# Altium PCB PCB1.PcbDoc
Units mm, origin at the board's own origin, x right, y up, seen from the top; angles counter-clockwise.
Board outline 53.47 x 77.85 mm, 2 copper layers (Top Layer, Bottom Layer); 24 components, 40 nets, 145 pads, 10 vias.
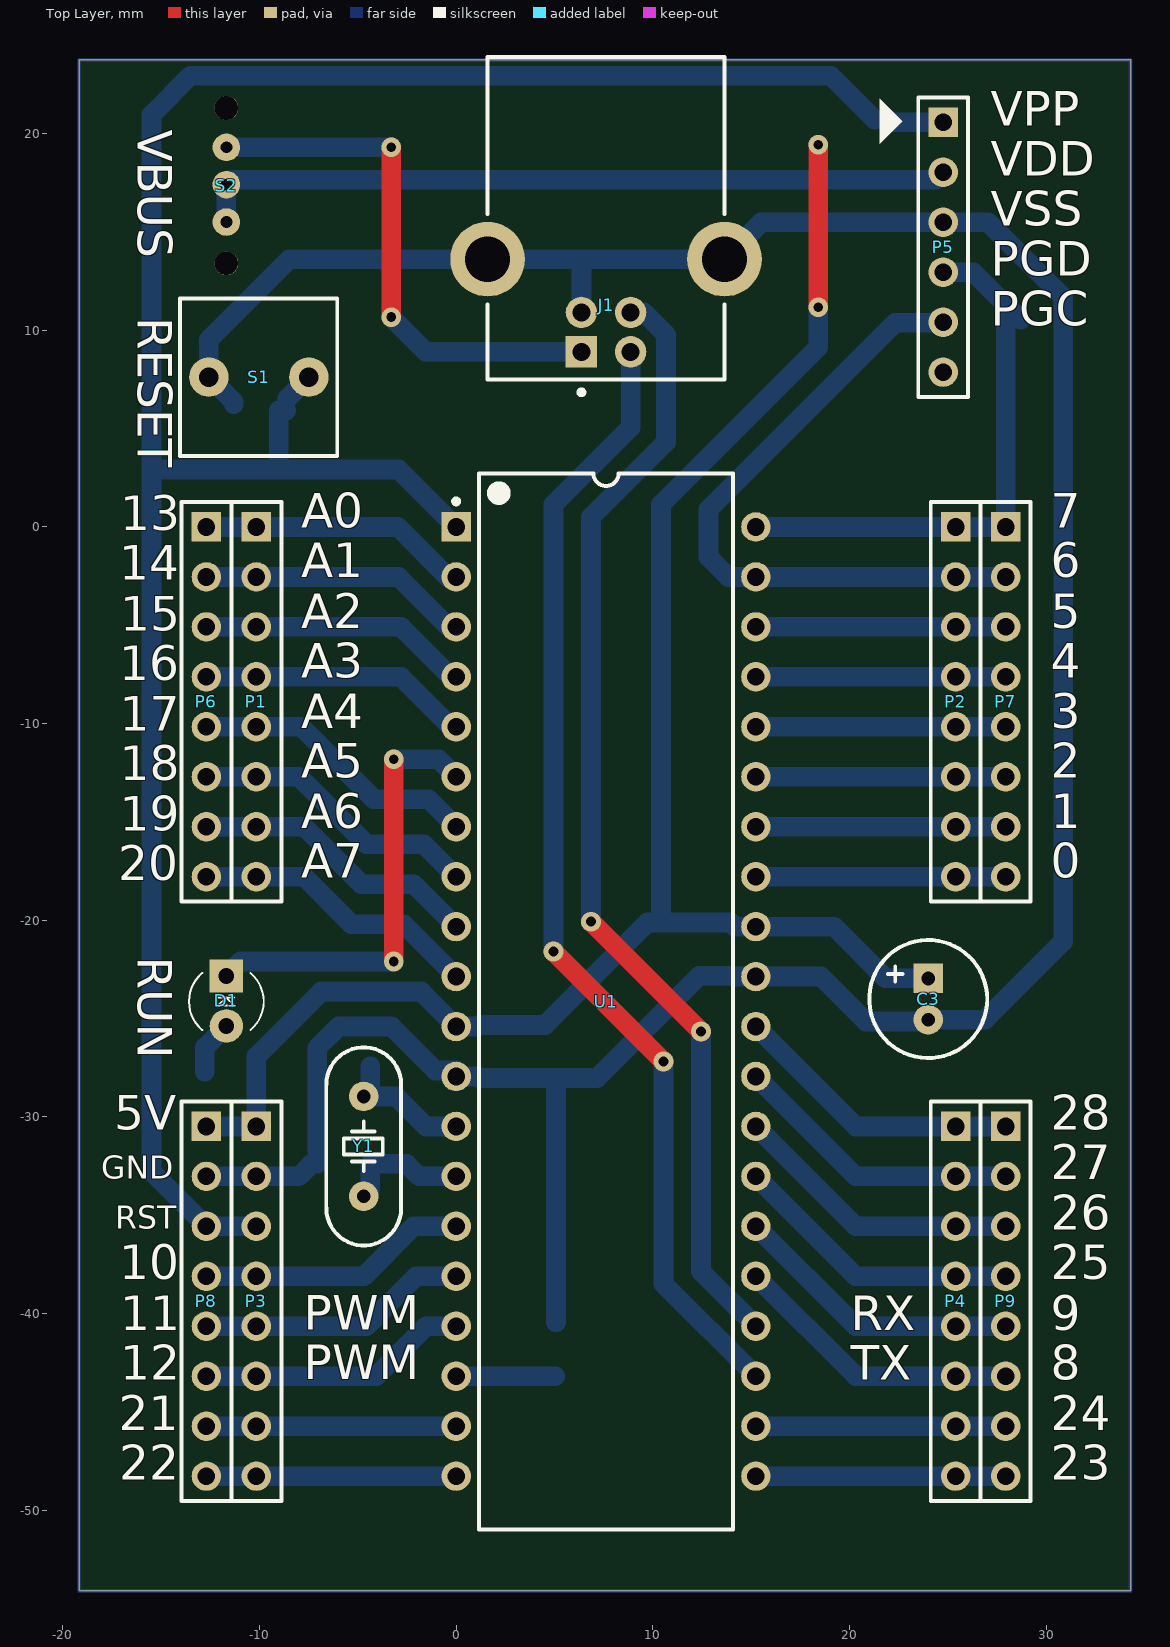
[diagram p0: Top Layer view]
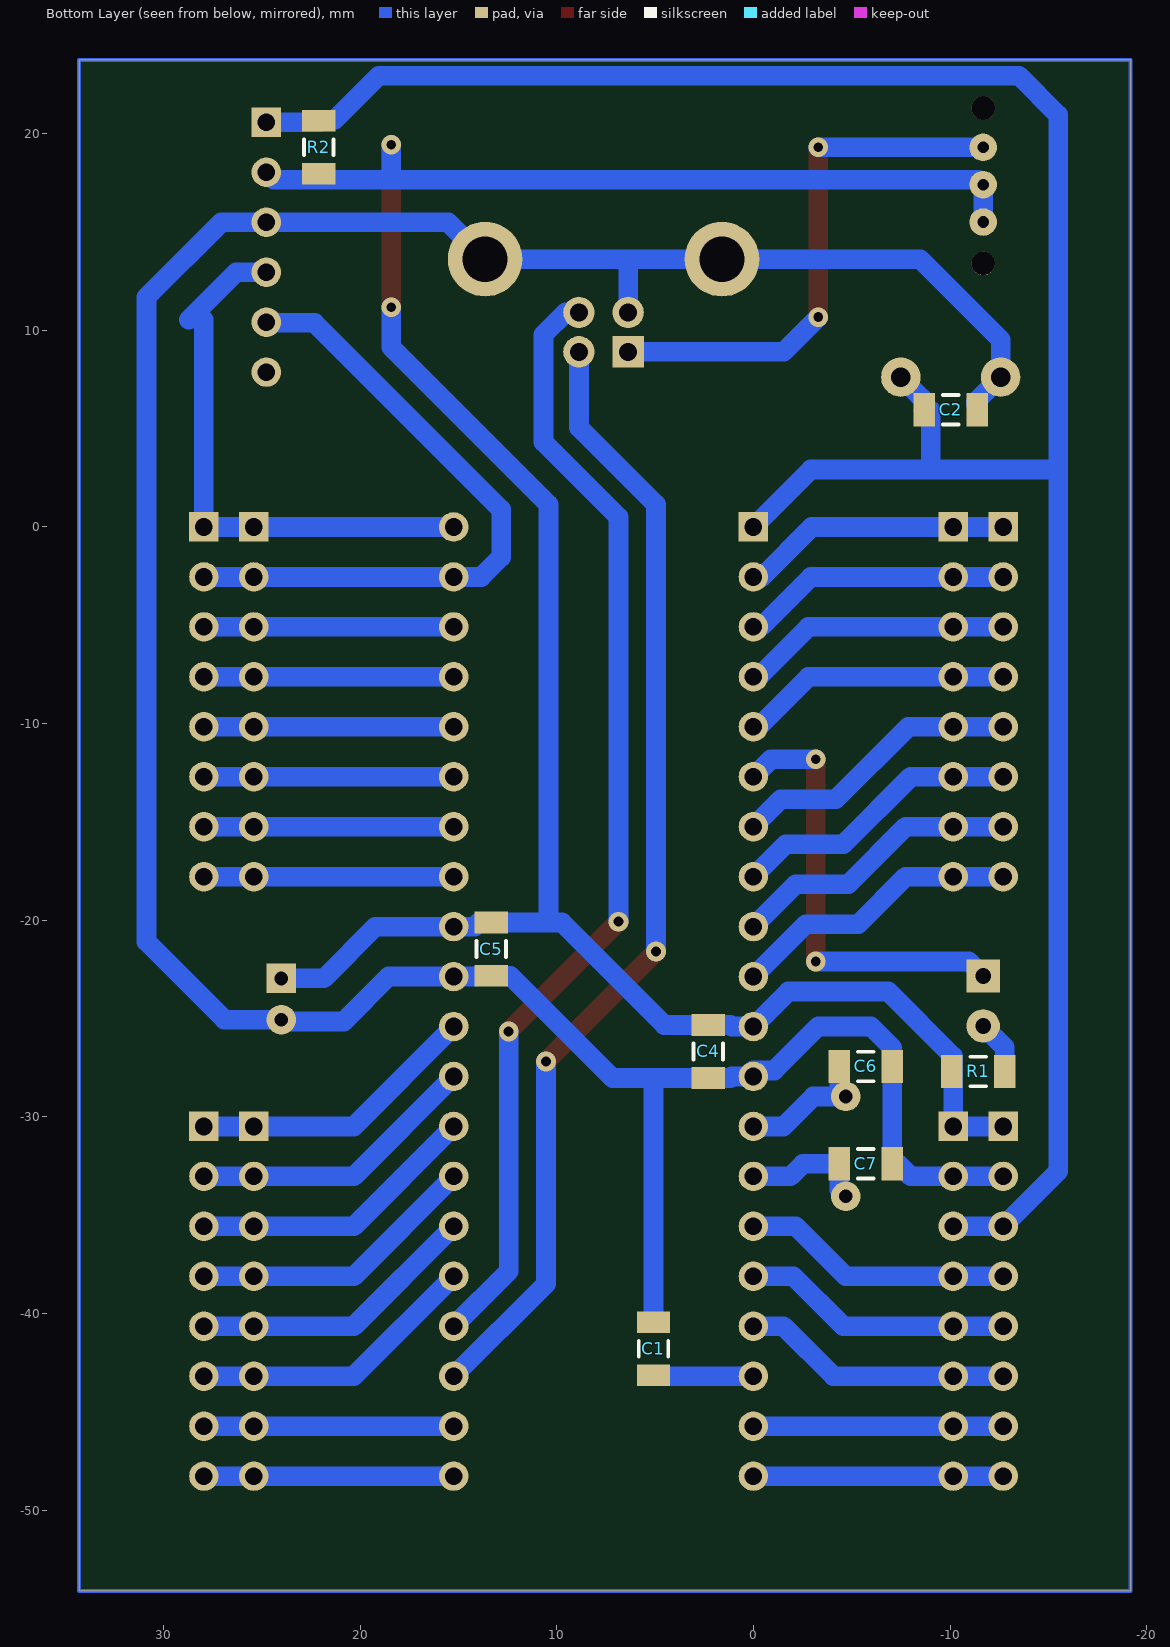
[diagram p1: Bottom Layer view, seen from below]

## Layer stack, top to bottom
Top Solder: solder mask 0.0102, Solder Resist, Dk 3.5
Top Layer: signal copper 0.0356
Dielectric 1: dielectric 0.32, FR-4, Dk 4.8
Bottom Layer: signal copper 0.0356
Bottom Solder: solder mask 0.0102, Solder Resist, Dk 3.5

## Board outline
-19.177,-54.102 -19.177,23.749 34.29,23.749 34.29,-54.102

## Design rules (kind name [scope] priority, off if disabled: settings)
Clearance [All] p1: gap=0.2
PolygonConnect [All] p1: connectstyle=Relief reliefconductorwidth=0.254 reliefentries=4 polygonreliefangle="90 Angle" airgapwidth=0.254
RoutingVias [All] p1: holewidth=0.711 width=1.27 viastyle="Through Hole" minholewidth=0.711 minwidth=1.27 maxholewidth=0.711 maxwidth=1.27
SolderMaskExpansion [All] p1: expansion=0.102
Width [All] p1: maxlimit=2 minlimit=0.5 preferedwidth=1
30 further rules are at their usual default settings.

## Components (designator, comment, footprint, x,y, rotation, side; value= is the part's Value field where it differs from the comment)
C1 "Cap" C1206 5.08,-41.783 r270 bottom
C2 "Cap" C1206 -10.033,5.969 r0 bottom
C3 "Cap Pol1" CAP1 24.003,-24.003 r90 top
C4 "Cap" C1206 2.286,-26.67 r90 bottom
C5 "Cap" C1206 13.335,-21.463 r90 bottom
C6 "Cap" C1206 -5.715,-27.432 r0 bottom
C7 "Cap" C1206 -5.715,-32.385 r0 bottom
D1 "LED" LED0 -11.684,-24.13 r90 top
J1 "USB-B_440119-1" USB-B 7.62,9.906 r90 top
P1 "Header 8" HDR1X8 -10.16,0 r270 top
P2 "Header 8" HDR1X8 25.4,0 r270 top
P3 "Header 8" HDR1X8 -10.16,-30.48 r270 top
P4 "Header 8" HDR1X8 25.4,-30.48 r270 top
P5 "Header 6" HDR1X6 24.765,20.574 r270 top
P6 "Header 8" HDR1X8 -12.7,0 r270 top
P7 "Header 8" HDR1X8 27.94,0 r270 top
P8 "Header 8" HDR1X8 -12.7,-30.48 r270 top
P9 "Header 8" HDR1X8 27.94,-30.48 r270 top
R1 "Res1" C1206 -11.43,-27.686 r0 bottom
R2 "Res1" C1206 22.098,19.304 r270 bottom
S1 "SW-PB" PUSH0 -12.573,7.62 r0 top
S2 "Switch 3 Pin Small" SW_ON_OFF_SMALL -11.684,19.304 r270 top
U1 "PIC18F4550-I/P" PDIP600-P40 7.62,-24.13 r0 top
Y1 "XTAL" XTAL -4.699,-31.496 r270 top

## Footprints (in the part's own frame and the unit in brackets; to place one, negate y for a bottom-side part, rotate by r counter-clockwise, add the part's x,y. Pads: shape width x height; smd on the part's side, far side on the other; paste and mask are expansions set on the pad)
C1206 [mm] "Chip Capacitor, Body 3.2x1.6mm, IPC High Density"
  rect 1.1x1.7 smd: 1(-1.35,0) 2(1.35,0)
  silkscreen extent -0.4,-0.75 0.4,0.75, body extent -1.7,-0.9 1.7,0.9, height 1.3
CAP1 [mm] "2.1mm Electrolyte Capacitor; 2 Leads"
  rect 1.5x1.5 hole 0.7: 1(1.05,0)
  round 1.5 hole 0.7: 2(-1.05,0)
  silkscreen extent -3,-3 3,3
HDR1X6 [mm] "Connector; Header; 6 Position"
  rect 1.5x1.5 hole 0.9: 1(0,0)
  round 1.5 hole 0.9: 2(2.54,0) 3(5.08,0) 4(7.62,0) 5(10.16,0) 6(12.7,0)
  silkscreen extent -1.27,-1.27 13.97,1.27
HDR1X8 [mm] "Connector; Header; 8 Position"
  rect 1.5x1.5 hole 0.9: 1(0,0)
  round 1.5 hole 0.9: 2(2.54,0) 3(5.08,0) 4(7.62,0) 5(10.16,0) 6(12.7,0) 7(15.24,0) 8(17.78,0)
  silkscreen extent -1.27,-1.27 19.05,1.27
LED0 [mm] "3mm Typical RED GaAs LED; 2 Leads"
  round 1.7 hole 0.8: 1(-1.24,0)
  rect 1.7x1.7 hole 0.8: 2(1.3,0)
  silkscreen extent -1.46,-1.9 1.46,1.9, body extent -1.89,-1.9 1.89,1.89, height 6.1
PDIP600-P40 [mm] "DIP, 40-Leads, Row Spacing 15.24mm, Pitch 2.54mm, Body 51.8x13.5mm"
  rect 1.5x1.5 hole 0.9: 1(-7.62,24.13)
  round 1.5 hole 0.9: 2(-7.62,21.59) 3(-7.62,19.05) 4(-7.62,16.51) 5(-7.62,13.97) 6(-7.62,11.43) 7(-7.62,8.89) 8(-7.62,6.35) 9(-7.62,3.81) 10(-7.62,1.27) 11(-7.62,-1.27) 12(-7.62,-3.81) 13(-7.62,-6.35) 14(-7.62,-8.89) 15(-7.62,-11.43) 16(-7.62,-13.97) 17(-7.62,-16.51) 18(-7.62,-19.05) 19(-7.62,-21.59) 20(-7.62,-24.13) 21(7.62,-24.13) 22(7.62,-21.59) 23(7.62,-19.05) 24(7.62,-16.51) 25(7.62,-13.97) 26(7.62,-11.43) 27(7.62,-8.89) 28(7.62,-6.35) 29(7.62,-3.81) 30(7.62,-1.27) 31(7.62,1.27) 32(7.62,3.81) 33(7.62,6.35) 34(7.62,8.89) 35(7.62,11.43) 36(7.62,13.97) 37(7.62,16.51) 38(7.62,19.05) 39(7.62,21.59) 40(7.62,24.13)
  silkscreen extent -7.74,-26.85 6.45,26.85, body extent -7.3,-26.85 7.3,26.85, height 6.35
PUSH0 [mm] "Push Button"
  round 2 hole 1: 1(0,0) 2(5.08,0)
  silkscreen extent -1.47,-4.01 6.53,3.99
SW_ON_OFF_SMALL [mm]
  round 1.2 hole 1.2: 0(-2,0) 0(5.9,0)
  round 1.4 hole 0.6: 1(0,0) 2(1.9,0) 3(3.8,0)
USB-B [mm] "Connector; USB1.1, Type B, Thru-Hole; 4 Position; Right Angle"
  rect 1.6x1.6 hole 0.92: 1(-1,1.25)
  round 1.6 hole 0.92: 2(-1,-1.25) 3(1,-1.25) 4(1,1.25)
  round 3.8 hole 2.3: 5(3.71,6.02) 6(3.71,-6.02)
  silkscreen extent -3.18,-6.02 13.99,6.02, body extent -3.04,-7.49 13.96,7.37, height 11.5
XTAL [mm] "Crystal, Thru Hole, 2 Leads"
  round 1.5 hole 0.7: 1(-2.54,0) 2(2.54,0)
  silkscreen extent -5.04,-1.91 5.04,1.91, body extent -5.67,-2.5 5.68,2.5, height 3.68

## Part data
C1 C2 C4 C5 C6 C7: "Capacitor"
C3: "Polarized Capacitor (Radial)"
D1: "Typical RED GaAs LED"
J1: "USB 1.1, Right Angle, Thru-Hole, B Type, Receptacle, 4 Position, Beige"
P1 P2 P3 P4 P6 P7 P8 P9: "Header, 8-Pin"
P5: "Header, 6-Pin"
R1 R2: "Resistor"
S1: "Switch"
S2: "Switch 3 Pin"
U1: "High Performance, Enhanced Flash, USB Microcontroller with nanoWatt Technology, 32K Flash, 40-Pin PDIP, Industrial Temperature Range"
Y1: "Crystal Oscillator"

## Via types
v1: diameter 1, hole 0.5, Top Layer to Bottom Layer, 10 vias

## Nets (pads, with @x,y where several pads share a name; then routed paths per layer and width w, separated by ;. In a path a pad name is that pad's centre, name@x,y a point inside that pad or via, vN(x,y) a via of type N, cw(c..) or ccw(c..) an arc to the next point about the centre after c; other vN are vias at no path point)
D+: J1.3 U1.24 | length 57.7
  Top Layer w1: v1(6.858,-20.066) v1(12.446,-25.654)
  Bottom Layer w1: v1(6.858,-20.066) 6.858,0.508 10.668,4.318 10.668,9.779 9.541,10.906 J1.3 ; v1(12.446,-25.654) 12.446,-37.846 U1.24
D-: J1.2 U1.23 | length 58
  Top Layer w1: v1(4.953,-21.59) v1(10.541,-27.178)
  Bottom Layer w1: v1(4.953,-21.59) 4.953,1.143 8.87,5.06 J1.2 ; v1(10.541,-27.178) 10.541,-38.481 U1.23
GND: C1.1 C2.1 C3.2 C4.1 C5.1 C6.1 C7.1 J1.4 J1.5 J1.6 P3.2 P5.3 P8.2 S1.1 U1.12 U1.31 | length 154.6
  Bottom Layer w1: P8.2 P3.2 -8.001,-33.02 -7.366,-32.385 C7.1 C6.1 -7.065,-26.496 -5.969,-25.4 -3.291,-25.4 -1.056,-27.635 0,-27.635 U1.12 1.092,-27.94 1.172,-28.02 C4.1 5.08,-28.02 ; C2.1@-11.303,6.256 -11.303,6.35 S1.1 -12.573,9.525 -8.482,13.616 J1.5 J1.6 15.518,15.494 24.003,15.494 ; C1.1 5.08,-28.02 ; J1.4 6.37,13.596 ; C3.2@24.003,-25.146 20.828,-25.146 18.542,-22.86 U1.31 14.119,-22.86 14.072,-22.813 12.366,-22.813 7.159,-28.02 5.08,-28.02 ; C3.2 26.89,-25.053 30.861,-21.082 30.861,11.684 27.051,15.494 P5.3
NetC1_2: C1.2 U1.18 | length 5
  Bottom Layer w1: U1.18 C1.2@5.033,-43.18
NetD1_1: D1.1 R1.1 | length 2.8
  Bottom Layer w1: R1.1 -12.78,-26.466 D1.1
NetD1_2: D1.2 U1.6 | length 22.4
  Top Layer w1: v1@-3.175,-21.844 v1(-3.175,-11.811)
  Bottom Layer w1: D1.2 -10.952,-22.098 v1(-3.175,-22.098) ; v1(-3.175,-11.811) -0.889,-11.811 U1.6
OSC1: C6.2 U1.13 Y1.1 | length 6.5
  Bottom Layer w1: C6.2 -4.365,-28.956 -3.048,-28.956 -1.524,-30.48 U1.13
OSC2: C7.2 U1.14 Y1.2 | length 6.4
  Bottom Layer w1: Y1.2 -4.365,-33.702 C7.2 -2.515,-32.385 -1.88,-33.02 U1.14
PIN0: P2.8 P7.8 U1.33 | length 12.7
  Bottom Layer w1: U1.33 P2.8 P7.8
PIN1: P2.7 P7.7 U1.34 | length 12.7
  Bottom Layer w1: U1.34 P2.7 P7.7
PIN2: P2.6 P7.6 U1.35 | length 12.7
  Bottom Layer w1: U1.35 P2.6 P7.6
PIN3: P2.5 P7.5 U1.36 | length 12.7
  Bottom Layer w1: U1.36 P2.5 P7.5
PIN4: P2.4 P7.4 U1.37 | length 12.7
  Bottom Layer w1: U1.37 P2.4 P7.4
PIN5: P2.3 P7.3 U1.38 | length 12.7
  Bottom Layer w1: U1.38 P2.3 P7.3
PIN6: P2.2 P5.5 P7.2 U1.39 | length 33.8
  Bottom Layer w1: P5.5@24.798,10.381 22.319,10.381 12.827,0.889 12.827,-1.524 13.843,-2.54 U1.39 P2.2 P7.2
PIN7: P2.1 P5.4 P7.1 U1.40 | length 28.2
  Bottom Layer w1: U1.40 P2.1 P7.1 27.94,10.541 ; P5.4 26.289,12.954 28.702,10.541
PIN8: P4.6 P9.6 U1.25 | length 14.8
  Bottom Layer w1: U1.25 20.32,-43.18 P4.6 P9.6
PIN9: P4.5 P9.5 U1.26 | length 14.8
  Bottom Layer w1: U1.26 20.32,-40.64 P4.5 P9.5
PIN10: P3.4 P8.4 U1.15 | length 13.8
  Bottom Layer w1: P8.4 P3.4 -4.699,-38.1 -2.159,-35.56 U1.15
PIN11: P3.5 P8.5 U1.16 | length 13.8
  Bottom Layer w1: P8.5 P3.5 -4.572,-40.64 -2.032,-38.1 U1.16
PIN12: P3.6 P8.6 U1.17 | length 13.8
  Bottom Layer w1: P8.6 P3.6 -4.064,-43.18 -1.524,-40.64 U1.17
PIN13: P1.1 P6.1 U1.2 | length 13.8
  Bottom Layer w1: P6.1 P1.1 -2.967,0 -0.427,-2.54 U1.2
PIN14: P1.2 P6.2 U1.3 | length 13.8
  Bottom Layer w1: P6.2 P1.2 -2.921,-2.54 -0.381,-5.08 U1.3
PIN15: P1.3 P6.3 U1.4 | length 13.8
  Bottom Layer w1: P6.3 P1.3 -2.794,-5.08 -0.254,-7.62 U1.4
PIN16: P1.4 P6.4 U1.5 | length 13.8
  Bottom Layer w1: P6.4 P1.4 -2.794,-7.62 -0.254,-10.16 U1.5
PIN17: P1.5 P6.5 U1.7 | length 14.8
  Bottom Layer w1: P6.5 P1.5 -7.874,-10.16 -4.191,-13.843 -1.397,-13.843 U1.7
PIN18: P1.6 P6.6 U1.8 | length 14.8
  Bottom Layer w1: P6.6 P1.6 -8.001,-12.7 -4.572,-16.129 -1.651,-16.129 U1.8
PIN19: P1.7 P6.7 U1.9 | length 14.8
  Bottom Layer w1: P6.7 P1.7 -7.747,-15.24 -4.826,-18.161 -2.159,-18.161 U1.9
PIN20: P1.8 P6.8 U1.10 | length 14.8
  Bottom Layer w1: P6.8 P1.8 -7.747,-17.78 -5.334,-20.193 -2.667,-20.193 U1.10
PIN21: P3.7 P8.7 U1.19 | length 12.7
  Bottom Layer w1: P8.7 P3.7 U1.19
PIN22: P3.8 P8.8 U1.20 | length 12.7
  Bottom Layer w1: P8.8 P3.8 U1.20
PIN23: P4.8 P9.8 U1.21 | length 12.7
  Bottom Layer w1: U1.21 P4.8 P9.8
PIN24: P4.7 P9.7 U1.22 | length 12.7
  Bottom Layer w1: U1.22 P4.7 P9.7
PIN25: P4.4 P9.4 U1.27 | length 14.8
  Bottom Layer w1: U1.27 20.32,-38.1 P4.4 P9.4
PIN26: P4.3 P9.3 U1.28 | length 14.8
  Bottom Layer w1: U1.28 20.32,-35.56 P4.3 P9.3
PIN27: P4.2 P9.2 U1.29 | length 14.8
  Bottom Layer w1: U1.29 20.32,-33.02 P4.2 P9.2
PIN28: P4.1 P9.1 U1.30 | length 14.8
  Bottom Layer w1: U1.30 20.32,-30.48 P4.1 P9.1
RESET: C2.2 P3.3 P5.1 P8.3 R2.1 S1.2 U1.1 | length 122.9
  Bottom Layer w1: -15.494,2.921 -2.921,2.921 U1.1 ; P3.3 P8.3 -15.494,-32.766 -15.494,20.955 -13.5,22.949 19.041,22.949 R2.1@21.289,20.701 ; -9.017,2.921 C2.2@-9.017,5.922 ; C2.2 C2.2@-8.636,5.922 ; C2.2@-8.572,6.54 S1.2 ; R2.1 22.018,20.574 P5.1
VCC: C3.1 C4.2 C5.2 P3.1 P5.2 P8.1 R1.2 R2.2 S2.2 S2.3 U1.11 U1.32 | length 128.7
  Top Layer w1: v1(18.415,11.176) v1(18.415,19.431)
  Bottom Layer w1: P8.1 P3.1 -10.16,-26.924 -6.858,-23.622 -1.778,-23.622 U1.11 1.092,-25.4 1.172,-25.32 C4.2 4.525,-25.32 9.732,-20.113 C5.2 13.97,-20.113 14.177,-20.32 U1.32 19.211,-20.32 21.844,-22.953 C3.1 ; S2.3 S2.2 -11.435,17.653 18.415,17.653 ; 10.414,-19.812 10.414,1.143 18.415,9.144 v1(18.415,11.176) ; v1(18.415,19.431) 18.415,17.653 ; P5.2 24.384,17.653 18.415,17.653
VUSB: J1.1 S2.1 | length 27.4
  Top Layer w1: v1(-3.302,10.668) v1(-3.302,19.304)
  Bottom Layer w1: S2.1 v1(-3.302,19.304) ; v1(-3.302,10.668) -1.54,8.906 J1.1
pads on no net: P5.6 S2.0
copper on no net: | length 262.6
  Bottom Layer w0.2: -19.177,-54.102 34.29,-54.102 34.29,23.749 -19.177,23.749 -19.177,-54.102

## Silkscreen, mask and mechanical layers (free items; w line width, h text height)
Top Overlay:
  region: 21.526,21.78 21.526,19.494 22.669,20.637
  text "VBUS" at -16.764,20.193 h3 r270
  text "VPP" at 27.178,19.812 h3
  text "VDD" at 27.178,17.272 h3
  text "VSS" at 27.178,14.732 h3
  text "PGD" at 27.178,12.192 h3
  text "RESET" at -16.764,10.668 h3 r270
  text "PGC" at 27.178,9.652 h3
  text "A0" at -7.874,-0.635 h3
  text "7" at 30.226,-0.635 h3
  text "13" at -17.069,-0.762 h3
  text "A1" at -7.874,-3.152 h3
  text "6" at 30.226,-3.152 h3
  text "14" at -17.14,-3.279 h3
  text "A2" at -7.874,-5.723 h3
  text "5" at 30.226,-5.723 h3
  text "15" at -17.072,-5.85 h3
  text "A3" at -7.874,-8.24 h3
  text "4" at 30.226,-8.24 h3
  text "16" at -17.122,-8.367 h3
  text "A4" at -7.874,-10.81 h3
  text "3" at 30.226,-10.81 h3
  text "17" at -17.105,-10.937 h3
  text "A5" at -7.874,-13.327 h3
  text "2" at 30.226,-13.327 h3
  text "18" at -17.113,-13.454 h3
  text "A6" at -7.874,-15.898 h3
  text "1" at 30.226,-15.898 h3
  text "19" at -17.102,-16.025 h3
  text "A7" at -7.874,-18.415 h3
  text "0" at 30.226,-18.415 h3
  text "20" at -17.181,-18.542 h3
  text "RUN" at -16.764,-21.844 h3 r270
  text "5V" at -17.394,-31.242 h3
  text "28" at 30.226,-31.242 h3
  text "GND" at -18.034,-33.528 h2
  text "27" at 30.226,-33.759 h3
  text "RST" at -17.343,-36.068 h2
  text "26" at 30.226,-36.33 h3
  text "10" at -17.122,-38.847 h3
  text "25" at 30.226,-38.847 h3
  text "PWM" at -7.747,-41.402 h3
  text "11" at -17.087,-41.417 h3
  text "RX" at 20.066,-41.417 h3
  text "9" at 30.226,-41.417 h3
  text "PWM" at -7.747,-43.919 h3
  text "12" at -17.075,-43.934 h3
  text "TX" at 20.066,-43.934 h3
  text "8" at 30.226,-43.934 h3
  text "21" at -17.146,-46.505 h3
  text "24" at 30.226,-46.505 h3
  text "22" at -17.134,-49.022 h3
  text "23" at 30.226,-49.022 h3